# Altium PCB PCB1.PcbDoc
Units mil, origin at the board's own origin, x right, y up, seen from the top; angles counter-clockwise.
Board outline 5740 x 7090 mil, 2 copper layers (Top Layer, Bottom Layer); 175 components, 99 nets, 503 pads, 0 vias.
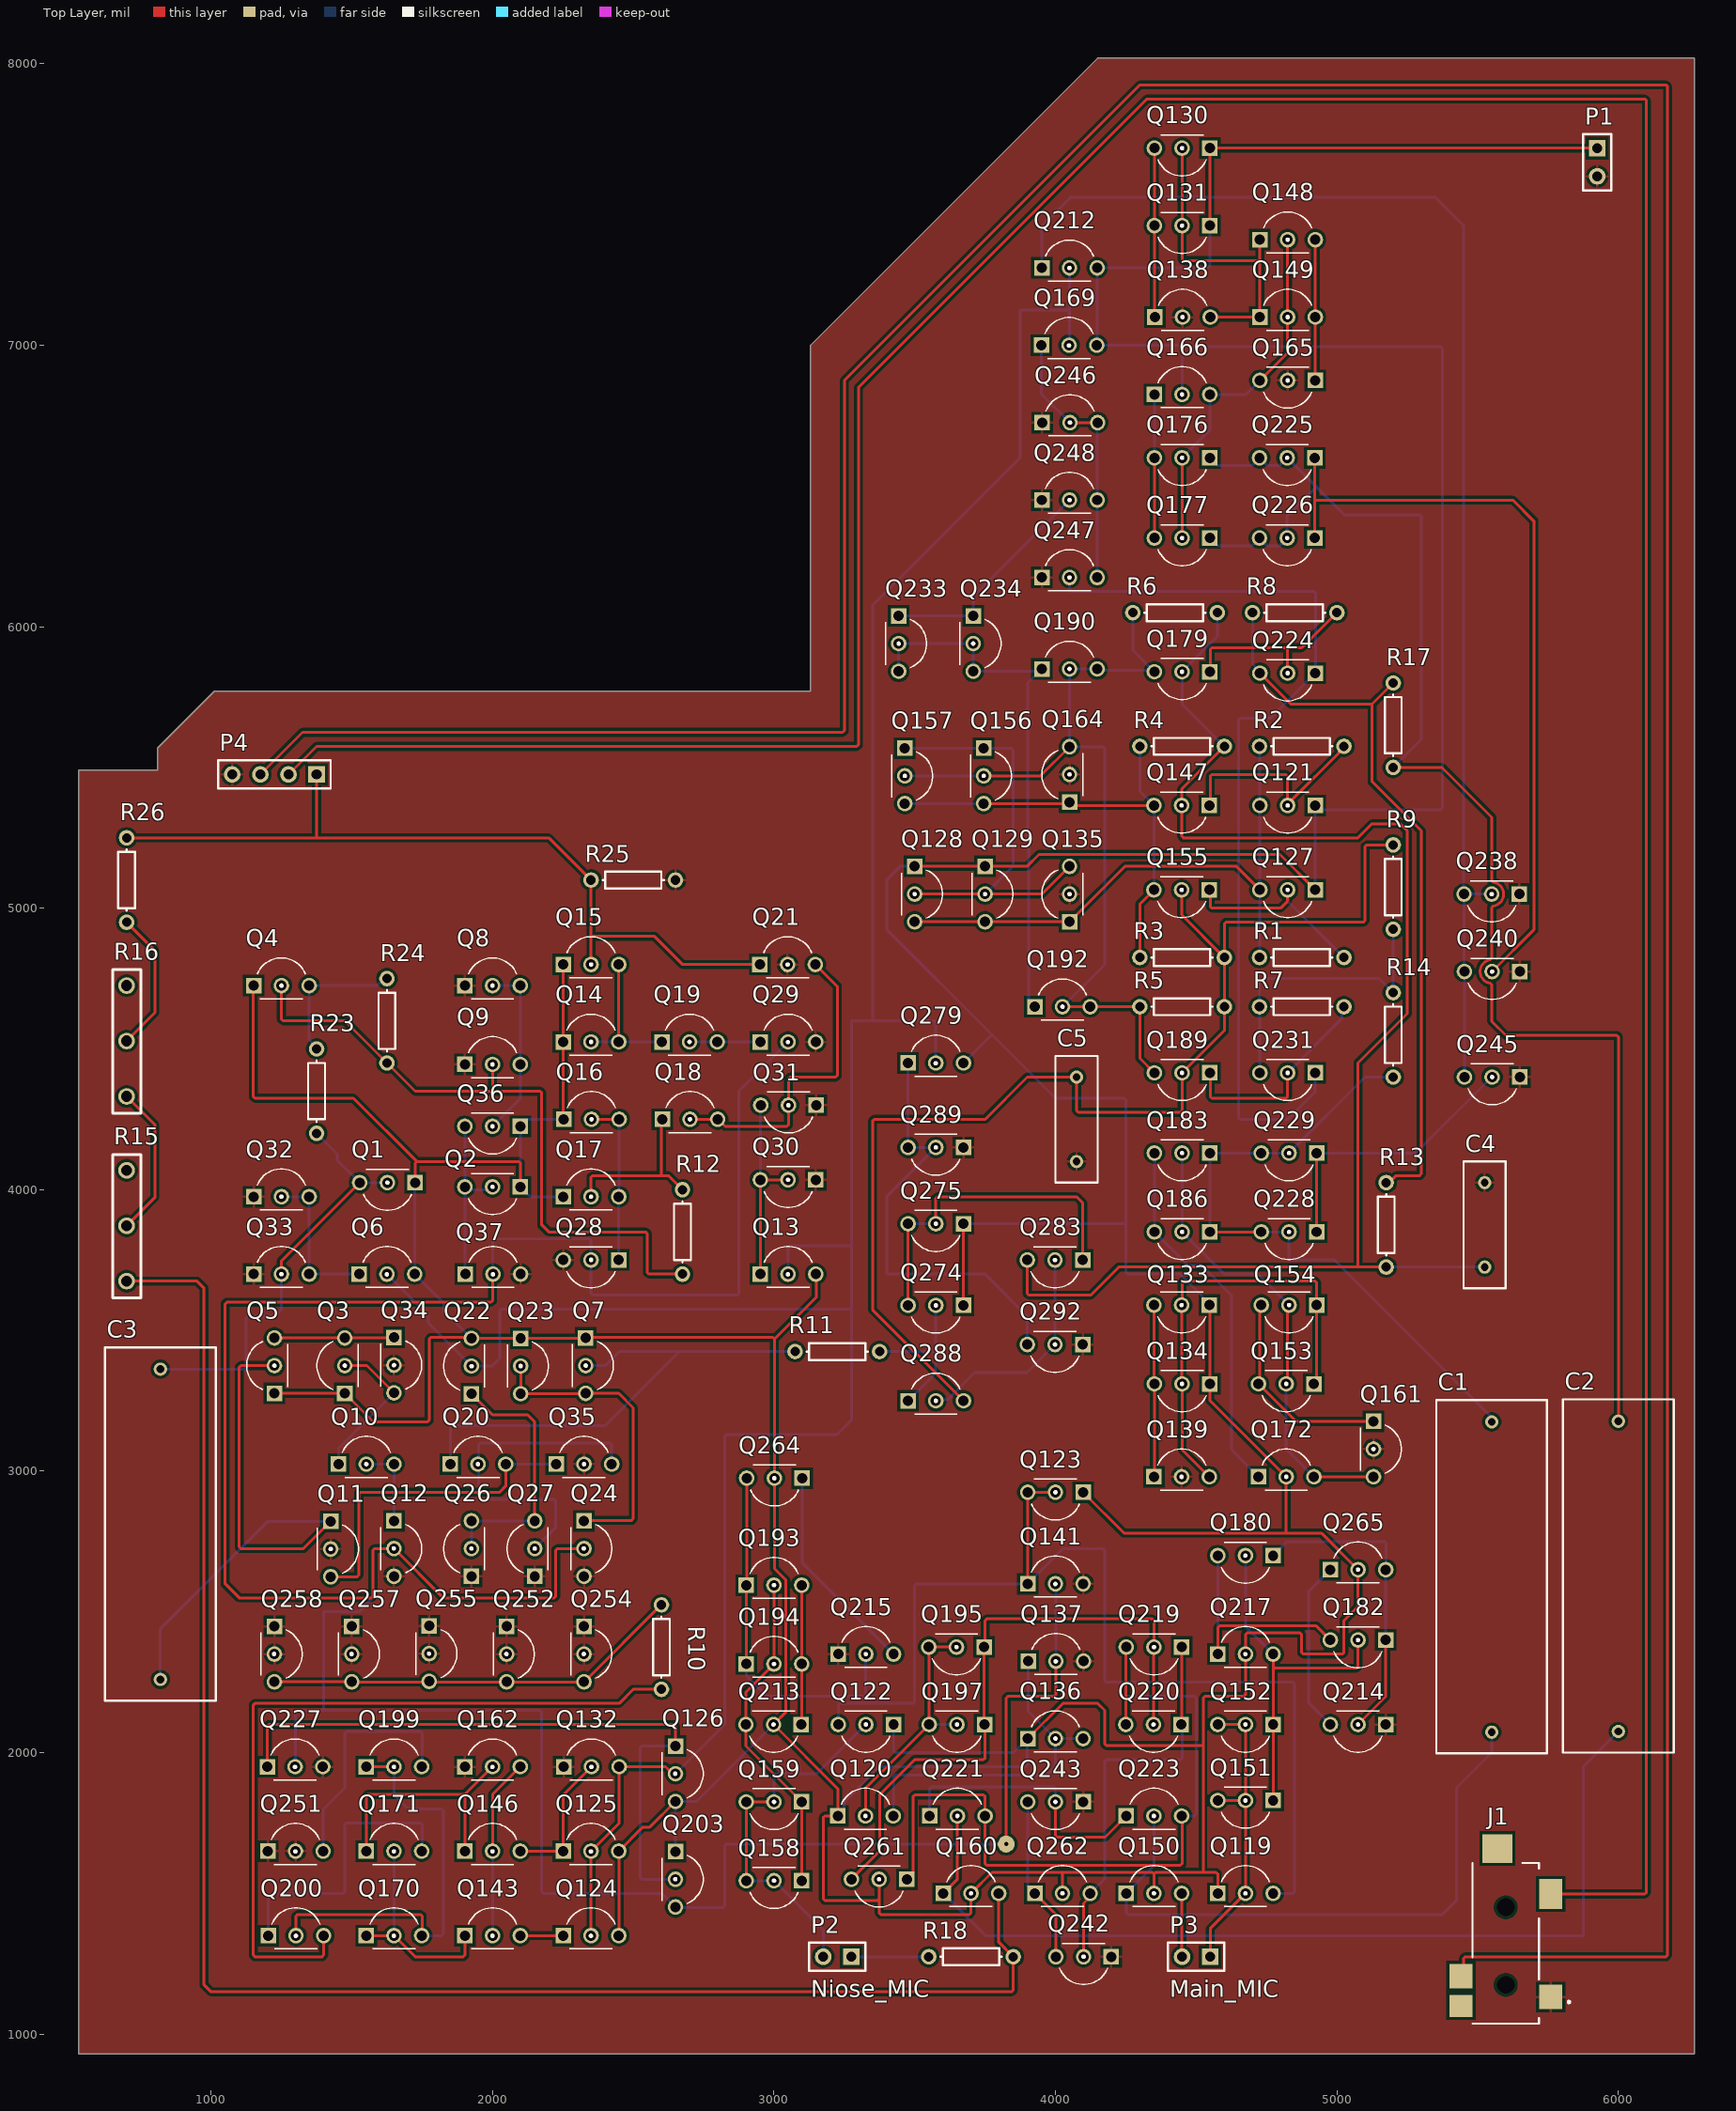
[diagram p0: Top Layer view]
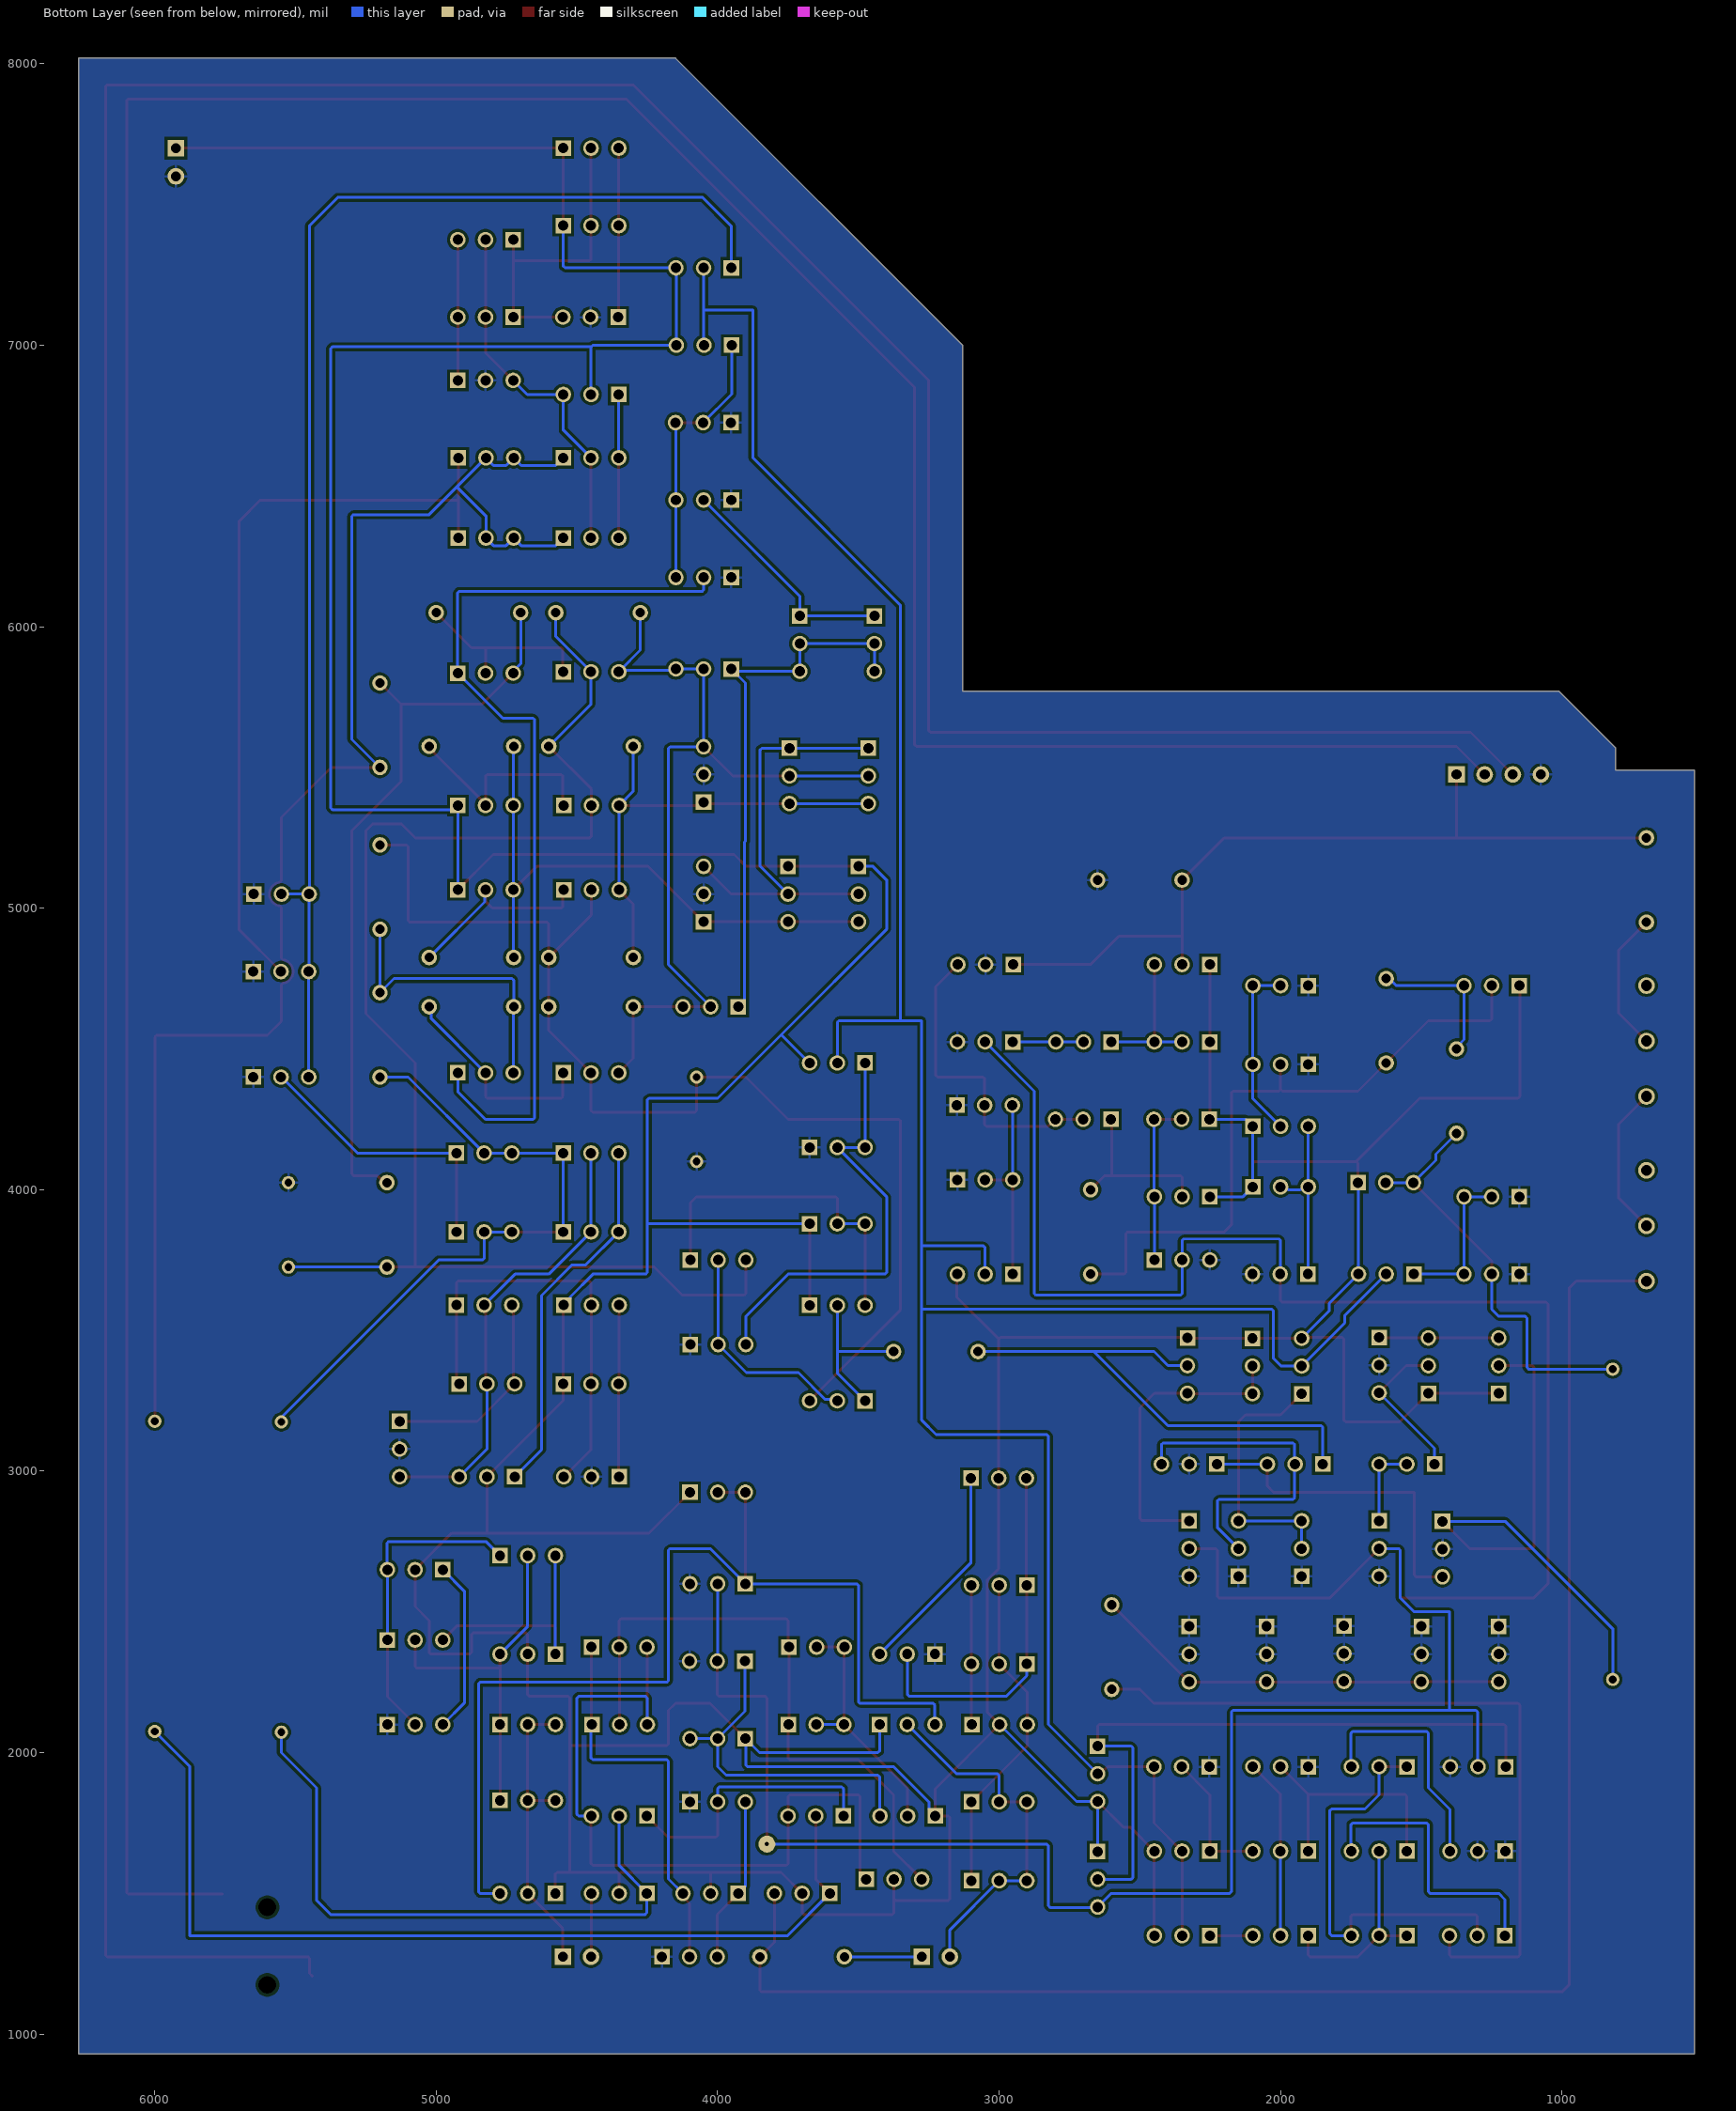
[diagram p1: Bottom Layer view, seen from below]
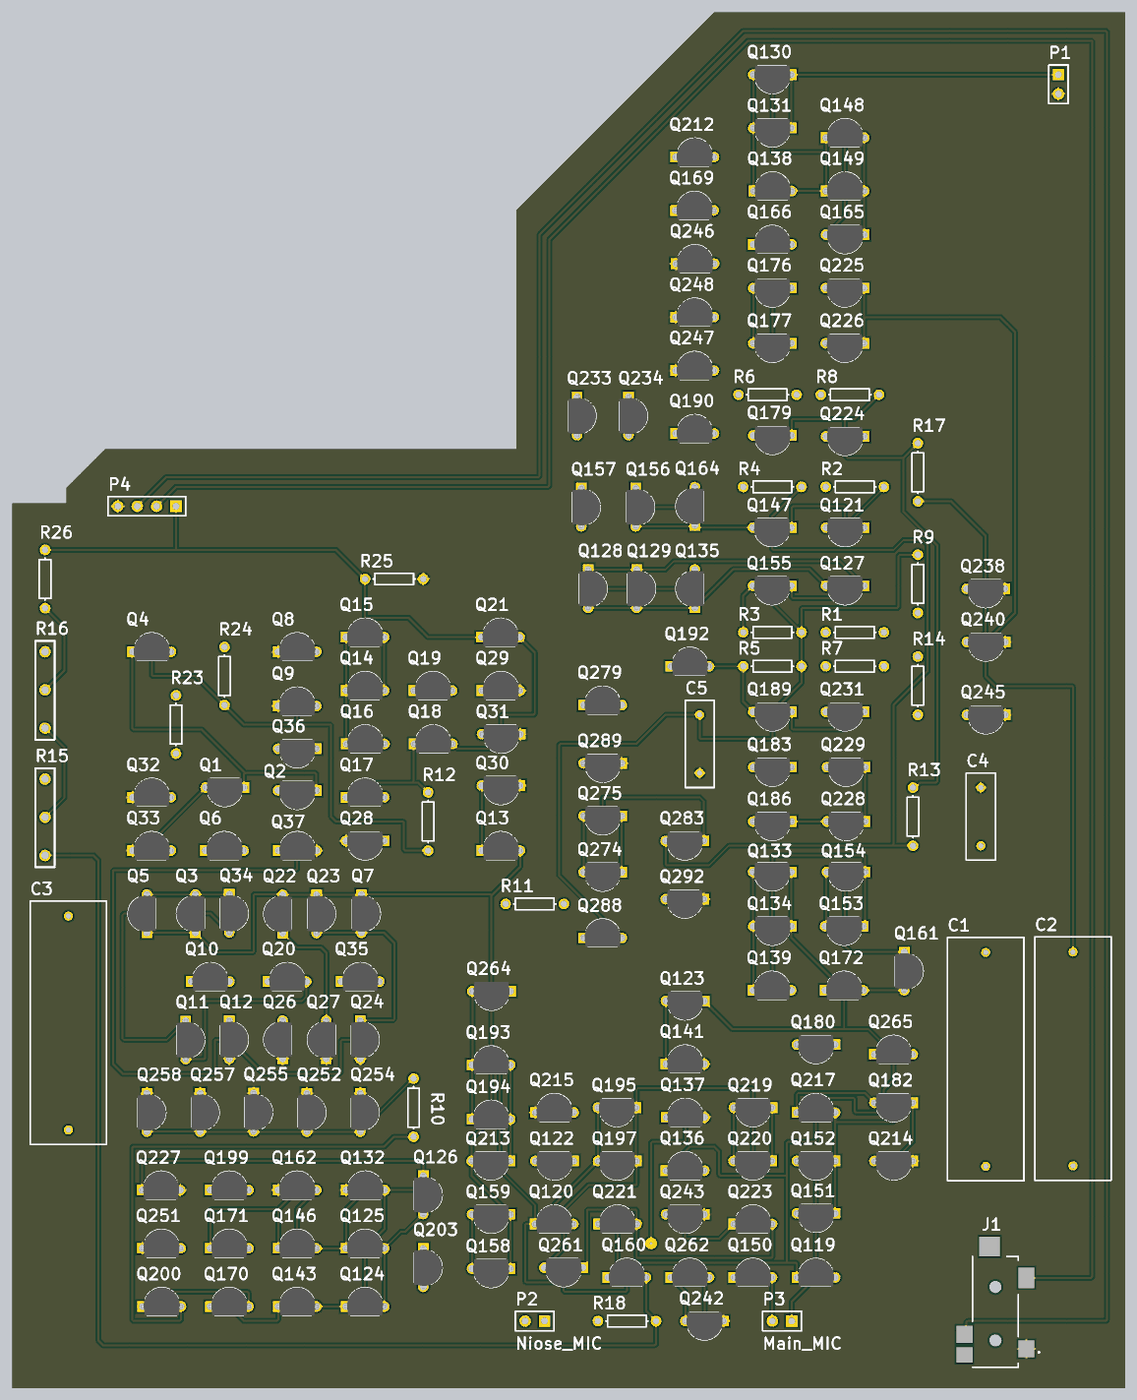
[diagram p2: 3D render of the assembled board from above, using the file's embedded part models]

## Layer stack, top to bottom
Top Solder: solder mask 0.4, Solder Resist, Dk 3.5
Top Layer: signal copper 1.4
Dielectric 1: dielectric 12.6, FR-4, Dk 4.8
Bottom Layer: signal copper 1.4
Bottom Solder: solder mask 0.4, Solder Resist, Dk 3.5

## Board outline
530,930 530,5490 810,5490 810,5570 1010,5770 3130,5770 3130,7000 4150,8020 6270,8020 6270,930

## Design rules (kind name [scope] priority, off if disabled: settings)
Clearance [All] p1: gap=10 ignorepadtopadclearanceinfootprint=FALSE except(0: Arc-Hole Track-Hole SMDPad-Hole THPad-Hole Via-Hole Fill-Hole Poly-Hole Region-Hole Text-Hole)
PolygonConnect [All] p1: connectstyle=Relief reliefconductorwidth=10 reliefentries=4 polygonreliefangle="90 Angle" airgapwidth=10
RoutingVias [All] p1: holewidth=28 width=50 viastyle="Through Hole" minholewidth=28 minwidth=50 maxholewidth=28 maxwidth=50
SolderMaskExpansion [All] p1: expansion=4 istentingtop=FALSE
Width [All] p1: maxlimit=10 minlimit=10 preferedwidth=10
30 further rules are at their usual default settings.

## Components (designator, comment, footprint, x,y, rotation, side; value= is the part's Value field where it differs from the comment)
C1 "Component_1" PCBComponent_1#1 5550,2072.64 r0 top
C2 "Component_1" PCBComponent_1#1 6000,2075 r0 top
C3 "Component_1" PCBComponent_1#1 820,2260 r0 top
C4 "Cap" RAD-0.3 5525,3875 r90 top value=1pF
C5 "Cap" RAD-0.3 4075,4250 r270 top value=1pF
J1 "35RASMT4BHNTRX" 35RASMT4BHNTRX 5600,1324.61 r90 top
P1 "BAT" HDR1X2 5925,7700 r270 top
P2 "Niose_MIC" HDR1X2 3275,1275 r180 top
P3 "Main_MIC" HDR1X2 4550,1275 r180 top
P4 "Header 4" HDR1X4 1375,5475 r180 top
Q1 "KSA992FTA" PCBComponent_1#2 1626.57,4025 r180 top
Q2 "KSA992FTA" PCBComponent_1#2 2000,4010 r180 top
Q3 "KSA992FTA" PCBComponent_1#2 1475,3375 r90 top
Q4 "KSA992FTA" PCBComponent_1#2 1250,4725 r0 top
Q5 "KSA992FTA" PCBComponent_1#2 1225,3375 r90 top
Q6 "BC560B" TO92250P510H770-3 1625,3700 r0 top
Q7 "KSA992FTA" PCBComponent_1#2 2331,3375 r270 top
Q8 "KSC1845FTA" PCBComponent_1#2 2000,4725 r0 top
Q9 "KSC1845FTA" PCBComponent_1#2 2000,4445 r0 top
Q10 "KSA992FTA" PCBComponent_1#2 1551.57,3025 r0 top
Q11 "KSA992FTA" PCBComponent_1#2 1425,2723.43 r270 top
Q12 "BC550B" TO92250P510H770-3 1650,2725 r270 top
Q13 "BC560B" TO92250P510H770-3 3050,3700 r0 top
Q14 "KSA992FTA" PCBComponent_1#2 2350,4525 r0 top
Q15 "KSA992FTA" PCBComponent_1#2 2350,4800 r0 top
Q16 "KSA992FTA" PCBComponent_1#2 2351.57,4250 r0 top
Q17 "KSA992FTA" PCBComponent_1#2 2350,3975 r0 top
Q18 "KSA992FTA" PCBComponent_1#2 2701.57,4250 r0 top
Q19 "KSA992FTA" PCBComponent_1#2 2700,4525 r0 top
Q20 "KSA992FTA" PCBComponent_1#2 1948.43,3025 r0 top
Q21 "KSA992FTA" PCBComponent_1#2 3048.43,4800 r0 top
Q22 "BC560B" TO92250P510H770-3 1925,3373.43 r90 top
Q23 "KSA992FTA" PCBComponent_1#2 2100,3373.43 r270 top
Q24 "BC550B" TO92250P510H770-3 2325,2725 r270 top
Q26 "KSC1845FTA" PCBComponent_1#2 1925,2725 r90 top
Q27 "KSC1845FTA" PCBComponent_1#2 2150,2725 r90 top
Q28 "BC550B" TO92250P510H770-3 2350,3750 r180 top
Q29 "BC550B" TO92250P510H770-3 3050,4525 r0 top
Q30 "KSC1845FTA" PCBComponent_1#2 3050,4035 r180 top
Q31 "KSC1845FTA" PCBComponent_1#2 3051.57,4300 r180 top
Q32 "KSC1845FTA" PCBComponent_1#2 1250,3975 r0 top
Q33 "KSC1845FTA" PCBComponent_1#2 1250,3700 r0 top
Q34 "KSA992FTA" PCBComponent_1#2 1650,3376.57 r270 top
Q35 "KSA992FTA" PCBComponent_1#2 2325,3025 r0 top
Q36 "KSA992FTA" PCBComponent_1#2 2000,4225 r180 top
Q37 "BC550B" TO92250P510H770-3 2001.57,3700 r0 top
Q119 "KSA992FTA" PCBComponent_1#2 4675,1500 r0 top
Q120 "KSA992FTA" PCBComponent_1#2 3325,1775 r0 top
Q121 "KSA992FTA" PCBComponent_1#2 4825,5365 r180 top
Q122 "KSA992FTA" PCBComponent_1#2 3326.57,2100 r180 top
Q123 "KSA992FTA" PCBComponent_1#2 4000,2925 r180 top
Q124 "BC560B" TO92250P510H770-3 2350,1350 r0 top
Q125 "BC560B" TO92250P510H770-3 2350,1650 r0 top
Q126 "BC560B" TO92250P510H770-3 2650,1925 r270 top
Q127 "KSA992FTA" PCBComponent_1#2 4825,5065 r180 top
Q128 "KSA992FTA" PCBComponent_1#2 3500,5050 r270 top
Q129 "KSA992FTA" PCBComponent_1#2 3750,5050 r270 top
Q130 "KSA992FTA" PCBComponent_1#2 4450,7700 r180 top
Q131 "KSA992FTA" PCBComponent_1#2 4450,7425 r180 top
Q132 "BC560B" TO92250P510H770-3 2351.57,1950 r0 top
Q133 "KSA992FTA" PCBComponent_1#2 4448.43,3590 r180 top
Q134 "KSA992FTA" PCBComponent_1#2 4450,3310 r180 top
Q135 "KSA992FTA" PCBComponent_1#2 4050,5050 r90 top
Q136 "KSA992FTA" PCBComponent_1#2 4000,2050 r0 top
Q137 "BC550B" TO92250P510H770-3 4001.57,2325 r0 top
Q138 "KSA992FTA" PCBComponent_1#2 4451.57,7100 r0 top
Q139 "KSA992FTA" PCBComponent_1#2 4448.43,2980 r0 top
Q141 "BC550B" TO92250P510H770-3 4000,2600 r0 top
Q143 "BC560B" TO92250P510H770-3 2000,1350 r0 top
Q146 "BC560B" TO92250P510H770-3 2000,1650 r0 top
Q147 "KSA992FTA" PCBComponent_1#2 4448.43,5365 r180 top
Q148 "KSA992FTA" PCBComponent_1#2 4825,7375 r0 top
Q149 "KSA992FTA" PCBComponent_1#2 4825,7100 r0 top
Q150 "KSC1845FTA" PCBComponent_1#2 4350,1500 r0 top
Q151 "KSC1845FTA" PCBComponent_1#2 4675,1830 r180 top
Q152 "KSC1845FTA" PCBComponent_1#2 4675,2100 r180 top
Q153 "KSA992FTA" PCBComponent_1#2 4820,3310 r180 top
Q154 "KSA992FTA" PCBComponent_1#2 4830,3590 r180 top
Q155 "KSA992FTA" PCBComponent_1#2 4448.43,5065 r180 top
Q156 "KSA992FTA" PCBComponent_1#2 3745,5470 r270 top
Q157 "KSA992FTA" PCBComponent_1#2 3465,5470 r270 top
Q158 "KSC1845FTA" PCBComponent_1#2 3000,1545 r180 top
Q159 "KSC1845FTA" PCBComponent_1#2 3000,1825 r180 top
Q160 "KSC1845FTA" PCBComponent_1#2 3700,1500 r0 top
Q161 "KSA992FTA" PCBComponent_1#2 5130,3078.43 r270 top
Q162 "BC560B" TO92250P510H770-3 2000,1950 r0 top
Q164 "KSA992FTA" PCBComponent_1#2 4050,5475 r90 top
Q165 "KSA992FTA" PCBComponent_1#2 4825,6875 r180 top
Q166 "KSC1845FTA" PCBComponent_1#2 4450,6825 r0 top
Q169 "BC560B" TO92250P510H770-3 4048.43,7000 r0 top
Q170 "BC550B" TO92250P510H770-3 1650,1350 r0 top
Q171 "BC550B" TO92250P510H770-3 1650,1650 r0 top
Q172 "KSC1845FTA" PCBComponent_1#2 4820,2980 r0 top
Q176 "KSC1845FTA" PCBComponent_1#2 4450,6600 r180 top
Q177 "KSC1845FTA" PCBComponent_1#2 4450,6315 r180 top
Q179 "KSC1845FTA" PCBComponent_1#2 4450,5840 r180 top
Q180 "KSC1845FTA" PCBComponent_1#2 4675,2700 r180 top
Q182 "KSC1845FTA" PCBComponent_1#2 5075,2400 r180 top
Q183 "KSC1845FTA" PCBComponent_1#2 4450,4130 r180 top
Q186 "KSC1845FTA" PCBComponent_1#2 4450,3850 r180 top
Q189 "KSC1845FTA" PCBComponent_1#2 4450,4415 r180 top
Q190 "KSC1845FTA" PCBComponent_1#2 4050,5850 r0 top
Q192 "KSC1845FTA" PCBComponent_1#2 4025,4650 r0 top
Q193 "KSC1845FTA" PCBComponent_1#2 3000,2595 r0 top
Q194 "KSC1845FTA" PCBComponent_1#2 3000,2315 r0 top
Q195 "KSC1845FTA" PCBComponent_1#2 3648.43,2375 r180 top
Q197 "KSC1845FTA" PCBComponent_1#2 3650,2100 r180 top
Q199 "BC550B" TO92250P510H770-3 1650,1950 r0 top
Q200 "BC550B" TO92250P510H770-3 1301.57,1350 r0 top
Q203 "BC550B" TO92250P510H770-3 2650,1550 r270 top
Q212 "BC560B" TO92250P510H770-3 4050,7275 r0 top
Q213 "KSC1845FTA" PCBComponent_1#2 2998.43,2100 r180 top
Q214 "KSC1845FTA" PCBComponent_1#2 5075,2100 r180 top
Q215 "KSC1845FTA" PCBComponent_1#2 3326.57,2350 r0 top
Q217 "KSC1845FTA" PCBComponent_1#2 4675,2350 r0 top
Q219 "KSC1845FTA" PCBComponent_1#2 4350,2375 r180 top
Q220 "KSC1845FTA" PCBComponent_1#2 4348.43,2100 r180 top
Q221 "KSC1845FTA" PCBComponent_1#2 3651.57,1775 r0 top
Q223 "KSC1845FTA" PCBComponent_1#2 4350,1775 r0 top
Q224 "KSC1845FTA" PCBComponent_1#2 4825,5835 r180 top
Q225 "KSC1845FTA" PCBComponent_1#2 4823.43,6600 r180 top
Q226 "KSC1845FTA" PCBComponent_1#2 4823.43,6315 r180 top
Q227 "BC550B" TO92250P510H770-3 1298.43,1950 r0 top
Q228 "KSC1845FTA" PCBComponent_1#2 4830,3850 r180 top
Q229 "KSC1845FTA" PCBComponent_1#2 4830,4130 r180 top
Q231 "KSC1845FTA" PCBComponent_1#2 4825,4415 r180 top
Q233 "KSC1845FTA" PCBComponent_1#2 3443,5940 r270 top
Q234 "KSC1845FTA" PCBComponent_1#2 3708,5940 r270 top
Q238 "KSC1845FTA" PCBComponent_1#2 5550,5050 r180 top
Q240 "KSC1845FTA" PCBComponent_1#2 5551.57,4775 r180 top
Q242 "KSC1845FTA" PCBComponent_1#2 4100,1275 r180 top
Q243 "KSC1845FTA" PCBComponent_1#2 4000,1825 r180 top
Q245 "KSC1845FTA" PCBComponent_1#2 5551.57,4400 r180 top
Q246 "KSC1845FTA" PCBComponent_1#2 4051.57,6725 r0 top
Q247 "KSC1845FTA" PCBComponent_1#2 4050,6175 r0 top
Q248 "KSC1845FTA" PCBComponent_1#2 4050,6450 r0 top
Q251 "BC560B" TO92250P510H770-3 1300,1650 r0 top
Q252 "BC560B" TO92250P510H770-3 2050,2350 r270 top
Q254 "BC560B" TO92250P510H770-3 2325,2350 r270 top
Q255 "BC560B" TO92250P510H770-3 1775,2351.57 r270 top
Q257 "BC560B" TO92250P510H770-3 1500,2350 r270 top
Q258 "BC560B" TO92250P510H770-3 1225,2350 r270 top
Q261 "KSC1845FTA" PCBComponent_1#2 3373.43,1550 r180 top
Q262 "KSC1845FTA" PCBComponent_1#2 4025,1500 r0 top
Q264 "KSC1845FTA" PCBComponent_1#2 3001.57,2975 r180 top
Q265 "KSC1845FTA" PCBComponent_1#2 5075,2650 r0 top
Q274 "KSA992FTA" PCBComponent_1#2 3575,3588.94 r180 top
Q275 "KSA992FTA" PCBComponent_1#2 3575,3878.94 r180 top
Q279 "BC560B" TO92250P510H770-3 3575,4450 r0 top
Q283 "KSA992FTA" PCBComponent_1#2 3998.43,3750 r180 top
Q288 "KSA992FTA" PCBComponent_1#2 3575,3250 r0 top
Q289 "KSC1845FTA" PCBComponent_1#2 3575,4150 r180 top
Q292 "KSC1845FTA" PCBComponent_1#2 3998.43,3450 r180 top
R1 "Res1" AXIAL-0.3 4875,4825 r180 top value=600k
R2 "Res1" AXIAL-0.3 4875,5575 r180 top value=600k
R3 "Res1" AXIAL-0.3 4450,4825 r180 top value=600k
R4 "Res1" AXIAL-0.3 4450,5575 r180 top value=600k
R5 "Res1" AXIAL-0.3 4450,4650 r0 top value=600k
R6 "Res1" AXIAL-0.3 4425,6050 r0 top value=600k
R7 "Res1" AXIAL-0.3 4875,4650 r0 top value=600k
R8 "Res1" AXIAL-0.3 4850,6050 r0 top value=600k
R9 "Res1" AXIAL-0.3 5200,5075 r90 top value=100k
R10 "Res1" AXIAL-0.3 2600,2375 r270 top value=20
R11 "Res1" AXIAL-0.3 3225,3425 r180 top value=5k
R12 "Res1" AXIAL-0.3 2675,3850 r90 top value=5k
R13 "Res1" AXIAL-0.3 5175,3875 r270 top value=100k
R14 "Res1" AXIAL-0.3 5200,4550 r270 top value=1K
R15 "Res1" PCBComponent_1#3 700,3871.85 r90 top value=9Meg
R16 "Res1" PCBComponent_1#3 700,4528.15 r90 top value=1Meg
R17 "Res1" AXIAL-0.3 5200,5650 r90 top value=1K
R18 "Res1" AXIAL-0.3 3700,1275 r0 top value=10K
R23 "Res1" AXIAL-0.3 1375,4350 r90 top value=100
R24 "Res1" AXIAL-0.3 1625,4600 r90 top value=33k
R25 "Res1" AXIAL-0.3 2500,5100 r0 top value=11k
R26 "Res1" AXIAL-0.3 700,5100 r90 top value=1Meg

## Footprints (in the part's own frame and the unit in brackets; to place one, negate y for a bottom-side part, rotate by r counter-clockwise, add the part's x,y. Pads: shape width x height; smd on the part's side, far side on the other; paste and mask are expansions set on the pad)
35RASMT4BHNTRX [mm]
  rect 2.2x2.1 smd: 1(-4.9,-4.05) 2(-3,4.05)
  rect 2.7x2.1 smd: 3(4.4,-4.05)
  rect 2x2.1 smd: 4(-5.7,4.05)
  rect 2.6x2.7 smd: 5(8.5,0.75)
  round 0.8 hole 1.6 unplated: MH1(-3.8,0) MH2(3.2,0)
  silkscreen extent -7.3,-5.8 7.2,3
AXIAL-0.3 [mm] "Axial Device, Thru-Hole; 2 Leads; 0.3 in Pin Spacing"
  round 1.4 hole 0.85: 1(-3.81,0) 2(3.81,0)
  silkscreen extent -2.77,-0.76 2.77,0.76
HDR1X2 [mm] "Connector; Header; 2 Position"
  rect 1.5x1.5 hole 0.9: 1(0,0)
  round 1.5 hole 0.9: 2(2.54,0)
  silkscreen extent -1.27,-1.27 3.81,1.27
HDR1X4 [mm] "Connector; Header; 4 Position"
  rect 1.5x1.5 hole 0.9: 1(0,0)
  round 1.5 hole 0.9: 2(2.54,0) 3(5.08,0) 4(7.62,0)
  silkscreen extent -1.27,-1.27 8.89,1.27
PCBComponent_1#1 [mm]
  round 1.2 hole 0.7: 1(0,0) 2(0,28)
  silkscreen extent -5,-1.91 5,29.97
PCBComponent_1#2 [mm]
  rect 1.4x1.4 / inner round 1.4 / far side rect 1.4x1.4 hole 0.93: 1(-2.5,0)
  round 1.4 hole 0.93: 2(0,0) 3(2.5,0)
  silkscreen extent -2.18,-1.19 2.18,2.5, body extent -2.73,-1.19 2.73,2.5, height 8.7
PCBComponent_1#3 [mm]
  round 1.5 hole 1: 1(-5,0) 2(0,0) 3(5,0)
  silkscreen extent -6.52,-1.27 6.43,1.27
RAD-0.3 [mm] "Radial Cap, Thru-Hole; 2 Leads; 0.3 in Pin Spacing"
  round 1.2 hole 0.7: 1(-3.81,0) 2(3.81,0)
  silkscreen extent -5.71,-1.91 5.71,1.91
TO92250P510H770-3 [mm]
  rect 1.4x1.4 / inner round 1.4 / far side rect 1.4x1.4 hole 0.93: 1(-2.5,0)
  round 1.4 hole 0.93: 2(0,0) 3(2.5,0)
  silkscreen extent -2.18,-1.19 2.18,2.5, body extent -2.73,-1.19 2.73,2.5, height 8.7

## Part data
C4 C5: "Capacitor", LatestRevisionDate=17-Jul-2002, LatestRevisionNote="Re-released for DXP Platform.", PackageDescription="Radial Cap, Thru-Hole; 2 Leads; 0.3 in Pin Spacing", PackageReference=RAD-0.3, Published=8-Jun-2000, Publisher="Altium Limited"
J1: "Phone Connectors SMT 3.5MM PHONE JACK", Manufacturer_Name=Switchcraft, Mouser Part Number=502-35RASMT4BHNTRX, Arrow Part Number=35RASMT4BHNTRX, Arrow Price/Stock=https://www.arrow.com/en/products/35rasmt4bhntrx/switchcraft?region=nac, Datasheet Link=https://www.arrow.com/en/products/35rasmt4bhntrx/switchcraft, Geometry.Height=5.127mm, Manufacturer_Part_Number=35RASMT4BHNTRX, Mouser Price/Stock=https://www.mouser.co.uk/ProductDetail/Switchcraft/35RASMT4BHNTRX?qs=iwvYsH9bSFa%252BoLnvLbECxQ%3D%3D
P1 P2 P3: library part "Header 2", "Header, 2-Pin", LatestRevisionDate=17-Jul-2002, LatestRevisionNote="Re-released for DXP Platform.", Publisher="Altium Limited"
P4: "Header, 4-Pin", LatestRevisionDate=17-Jul-2002, LatestRevisionNote="Re-released for DXP Platform.", Publisher="Altium Limited"
Q1 Q2 Q3 Q4 Q5 Q7 Q10 Q11 Q14 Q15 Q16 Q17 Q18 Q19 Q20 Q21 Q23 Q34 Q35 Q36 Q119 Q120 Q121 Q122 Q123 Q127 Q128 Q129 Q130 Q131 Q133 Q134 Q135 Q136 Q138 Q139 Q147 Q148 Q149 Q153 Q154 Q155 Q156 Q157 Q161 Q164 Q165 Q274 Q275 Q283 Q288: "TO-92, 120V, 0.05A,VA=100V,small signal PNP Bipolar Transistor", Package="TO-92 Taiwan Semiconductor", Availability="In Stock", Check_prices=https://www.snapeda.com/parts/BC337-40%20A1G/Taiwan+Semiconductor/view-part/?ref=eda, MF="Taiwan Semiconductor", MP="BC337-40 A1G", Price=None, Purchase-URL="https://pricing.snapeda.com/search/part/BC337-40 A1G/?ref=eda", SnapEDA_Link=https://www.snapeda.com/parts/BC337-40%20A1G/Taiwan+Semiconductor/view-part/?ref=snap
Q6 Q13 Q22 Q124 Q125 Q126 Q132 Q143 Q146 Q162 Q169 Q212 Q251 Q252 Q254 Q255 Q257 Q258 Q279: "TO-92, 45V, 0.1A, PNP Bipolar Transistor", Package="TO-92 Taiwan Semiconductor", Availability="In Stock", Check_prices=https://www.snapeda.com/parts/BC337-40%20A1G/Taiwan+Semiconductor/view-part/?ref=eda, MF="Taiwan Semiconductor", MP="BC337-40 A1G", Price=None, Purchase-URL="https://pricing.snapeda.com/search/part/BC337-40 A1G/?ref=eda", SnapEDA_Link=https://www.snapeda.com/parts/BC337-40%20A1G/Taiwan+Semiconductor/view-part/?ref=snap
Q8 Q9 Q26 Q27 Q30 Q31 Q32 Q33 Q150 Q151 Q152 Q158 Q159 Q160 Q166 Q172 Q176 Q177 Q179 Q180 Q182 Q183 Q186 Q189 Q190 Q192 Q193 Q194 Q195 Q197 Q213 Q214 Q215 Q217 Q219 Q220 Q221 Q223 Q224 Q225 Q226 Q228 Q229 Q231 Q233 Q234 Q238 Q240 Q242 Q243 Q245 Q246 Q247 Q248 Q261 Q262 Q264 Q265 Q289 Q292: "TO-92, 120V, 0.05A,150VA,small signall NPN Bipolar Transistor", Package="TO-92 Taiwan Semiconductor", Availability="In Stock", Check_prices=https://www.snapeda.com/parts/BC337-40%20A1G/Taiwan+Semiconductor/view-part/?ref=eda, MF="Taiwan Semiconductor", MP="BC337-40 A1G", Price=None, Purchase-URL="https://pricing.snapeda.com/search/part/BC337-40 A1G/?ref=eda", SnapEDA_Link=https://www.snapeda.com/parts/BC337-40%20A1G/Taiwan+Semiconductor/view-part/?ref=snap
Q12 Q24 Q28 Q29 Q37 Q137 Q141 Q170 Q171 Q199 Q200 Q203 Q227: "TO-92, 45V, 0.1A, NPN Bipolar Transistor", Package="TO-92 Taiwan Semiconductor", Availability="In Stock", Check_prices=https://www.snapeda.com/parts/BC337-40%20A1G/Taiwan+Semiconductor/view-part/?ref=eda, MF="Taiwan Semiconductor", MP="BC337-40 A1G", Price=None, Purchase-URL="https://pricing.snapeda.com/search/part/BC337-40 A1G/?ref=eda", SnapEDA_Link=https://www.snapeda.com/parts/BC337-40%20A1G/Taiwan+Semiconductor/view-part/?ref=snap
R1 R2 R3 R4 R5 R6 R7 R8 R9 R10 R11 R12 R13 R14 R15 R16 R17 R18 R23 R24 R25 R26: "Resistor", LatestRevisionDate=17-Jul-2002, LatestRevisionNote="Re-released for DXP Platform.", PackageDescription="Axial Device, Thru-Hole; 2 Leads; 0.3 in Pin Spacing", PackageReference=AXIAL-0.3, Published=8-Jun-2000, Publisher="Altium Limited"

## Free pads (board coordinates)
  round 60 hole 15: 3(3825,1675)

## Nets (pads, with @x,y where several pads share a name; then routed paths per layer and width w, separated by ;. In a path a pad name is that pad's centre, name@x,y a point inside that pad or via, vN(x,y) a via of type N, cw(c..) or ccw(c..) an arc to the next point about the centre after c; other vN are vias at no path point)
Basen2: pad.3 Q12.2 Q24.2 Q28.2 Q29.2 Q37.2 Q137.2 Q141.2 Q203.3 Q227.2 | length 11404.2
  Top Layer w10: Q37.2 2000,3698.43 2000,3605.86 1994.14,3600 1055.86,3600 1050,3594.14 1050,2600 1100,2550 1569.14,2550 1575,2555.86 1575,2719.14 1580.86,2725 Q12.2 1825,2550 2219.14,2550 2225,2555.86 2225,2719.14 2230.86,2725 Q24.2 ; Q203.3 Q203.3@2651.57,1450 ; pad.3@3819.14,1675 3825,1680.86 3825,2194.14 3830.86,2200 3995.72,2200 4001.57,2205.86 Q137.2
  Bottom Layer w10: Q227.2 1300,1951.57 1300,2144.14 1305.86,2150 1400,2150 ; Q12.2 1580.86,2725 1575,2719.14 1575,2550 1525,2500 1400,2500 1400,2150 ; Q37.2 2000,3701.57 2000,3819.14 2005.86,3825 2344.14,3825 2350,3819.14 Q28.2 2350,3630.86 2355.86,3625 2869.14,3625 2875,3630.86 2875,4350 Q29.2 ; pad.3 2830.86,1675 2825,1669.14 2825,1455.86 2819.14,1450 2651.57,1450 Q203.3 2601.57,1500 2180.86,1500 2175,1505.86 2175,2144.14 2169.14,2150 1400,2150 ; Q141.2 4000.79,2599.21 4000.79,2325.79 Q137.2
Basep1: Q6.2 Q13.2 Q22.2 Q124.2 Q125.2 Q126.2 Q132.3 Q169.2 Q212.2 Q279.2 | length 9966
  Top Layer w10: Q124.2 Q125.2 2450,1750 Q132.3 2614.81,1950 2639.81,1925 Q126.2
  Bottom Layer w10: Q6.2 1771.95,3553.05 1771.95,3526.48 Q22.2 1998.43,3373.43 2025,3400 2025,3569.14 2030.86,3575 3275,3575 ; Q124.2 Q124.2@2354.32,1354.32 ; Q126.2 2825,2100 2825,3124.14 2830.86,3130 3224.14,3130 3275,3180.86 3275,3575 ; Q13.2 3050,3794.14 3055.86,3800 3275,3800 ; Q279.2 3575,4594.14 3569.14,4600 3350,4600 ; Q169.2 4049.21,7000.79 4049.21,7125 ; Q212.2 4049.21,7274.21 4049.21,7125 ; 3275,3575 3275,3800 ; 3275,3800 3275,4600 3350,4600 ; 3350,4600 3350,6075 3875,6600 3875,7125 4049.21,7125
basep2: Q143.2 Q146.2 Q162.3 | length 640.8
  Top Layer w10: Q146.2 2000,1851.57 Q162.3
  Bottom Layer w10: Q143.2 Q146.2
GND: C4.2 C5.2 J1.1 P1.2 P4.4 Q8.1 Q9.1 Q11.2 Q12.3 Q21.2 Q24.3 Q26.1 Q27.1 Q28.3 Q29.3 Q30.1 Q31.1 Q32.1 Q33.1 Q34.2 Q35.2 Q37.3 Q132.1 Q135.2 Q137.3 Q138.2 Q139.2 Q141.3 Q161.2 Q162.1 Q164.2 Q165.2 Q214.1 Q215.1 Q227.3 Q238.1 Q240.1 Q242.1 Q243.1 Q245.1 Q246.1 Q247.1 Q248.1 Q251.1 Q251.2 Q252.1 Q252.2 Q254.1 Q254.2 Q255.1 Q255.2 Q257.1 Q257.2 Q258.1 Q258.2 Q289.1 Q292.1 R25.2
NetC1_1: C1.1 Q150.1 Q223.2 | length 2230.9
  Bottom Layer w10: Q223.2 4350,1598.43 Q150.1 4251.57,1430.86 4257.43,1425 5375,1425 5425,1475 5425,1875 5550,2000 C1.1
NetC1_2: C1.2 Q183.1 Q186.1 Q228.2 Q228.3 Q229.2 Q229.3 R14.2 | length 2389.2
  Top Layer w10: Q186.1 Q228.3
  Bottom Layer w10: Q186.1 Q183.1 Q229.3 Q229.2 5100,4400 R14.2 ; Q228.3 Q228.2 4830,3755.86 4835.86,3750 4991.21,3750 5550,3191.21 C1.2
NetC2_1: C2.1 Q160.1 Q221.2 | length 3408
  Top Layer w10: Q160.1 3651.57,1550 Q221.2
  Bottom Layer w10: Q160.1 3751.57,1350 5875,1350 5875,1950 C2.1
NetC2_2: C2.2 Q176.1 Q177.1 Q225.2 Q225.3 Q226.2 Q226.3 R17.1 | length 5429.9
  Top Layer w10: R17.1 5373.04,5500 5550,5323.04 5550,5097.46 5552.93,5094.53 5555.22,5092.24 cw(c5550,5050) 5555.22,5007.76 5552.93,5005.47 5550,5002.54 5550,4822.13 5547.07,4819.2 5544.91,4817.03 ccw(c5551.57,4775) 5544.91,4732.97 5550,4727.87 5550,4598.04 5600,4548.04 5994.14,4548.04 6000,4542.18 C2.2
  Bottom Layer w10: Q177.1 4575.39,6288.04 4698.04,6288.04 Q226.3 4751.96,6288.04 4796.46,6288.04 Q226.2 4823.43,6393.43 4926.71,6496.71 ; Q176.1 4575.39,6573.04 4698.04,6573.04 Q225.3 4751.96,6573.04 4796.46,6573.04 Q225.2 4926.71,6496.71 ; R17.1 5300,5600 5300,6392.18 5294.14,6398.04 5025.39,6398.04 4926.71,6496.71
NetC3_1: C3.1 Q5.2 Q11.1 | length 2076.4
  Top Layer w10: Q5.2 1105.86,3375 1100,3369.14 1100,2730.86 1105.86,2725 1328.15,2725 Q11.1
  Bottom Layer w10: C3.1 820,2440 1201.85,2821.85 Q11.1
NetC3_2: C3.2 Q1.2 Q1.3 Q33.2 R23.1 | length 1523.2
  Top Layer w10: Q33.2 1250,3746.85 Q1.3
  Bottom Layer w10: C3.2 1119.14,3362.36 1125,3368.22 1125,3544.14 1130.86,3550 1225,3550 1250,3575 Q33.2 ; R23.1 1448.52,4126.48 1448.52,4104.63 Q1.3 Q1.2
NetC4_1: C4.1 Q147.2 Q179.2 Q283.3 R4.1 R6.2 R13.2 | length 5216.4
  Top Layer w10: Q283.3 3900,3630.86 3905.86,3625 4125,3625 4225,3725 5075,3725 ; R4.1 4448.43,5423.43 Q147.2 4448.43,5255.86 4454.28,5250 5075,5250 5125,5300 5225,5300 5250,5275 5250,4625 5075,4450 5075,3725 ; R13.2 5075,3725
  Bottom Layer w10: R6.2 4575,5965 Q179.2 4450,5725 R4.1 ; R13.2 C4.1
NetC5_1: C5.1 Q155.2 Q189.2 Q288.3 R3.1 R5.2 R9.2 | length 4315.4
  Top Layer w10: Q288.3 3350,3573.43 3350,4244.14 3355.86,4250 3750,4250 3900,4400 C5.1 4075,4280.86 4080.86,4275 4444.14,4275 4450,4280.86 Q189.2 4600,4565 R5.2 R3.1 ; Q155.2 4448.43,4976.57 R3.1 ; R9.2 5105.86,5225 5100,5219.14 5100,4955.86 5094.14,4950 4605.86,4950 4600,4944.14 R3.1
NetJ1_2: J1.2 P4.3 | length 14180.7
  Top Layer w10: P4.3 1325,5625 3244.14,5625 3250,5630.86 3250,6875 4300,7925 6169.14,7925 6175,7919.14 6175,1280.86 6169.14,1275 5455.86,1275 5450,1269.14 5450,1215.94 J1.2
NetJ1_3: J1.3 P4.2 | length 13273.4
  Top Layer w10: P4.2 1375,5575 3294.14,5575 3300,5580.86 3300,6850 4325,7875 6094.14,7875 6100,7869.14 6100,1503.69 6094.14,1497.83 J1.3
NetP1_1: P1.1 Q1.1 Q2.1 Q3.1 Q4.1 Q5.1 Q6.3 Q7.1 Q13.3 Q14.1 Q15.1 Q16.1 Q17.1 Q22.3 Q23.1 Q36.1 Q119.1 Q120.1 Q121.1 Q122.1 Q123.1 Q124.3 Q125.3 Q126.3 Q127.1 Q128.1 Q129.1 Q130.1 Q131.1 Q133.1 Q134.1 Q136.1 Q150.2 Q160.2 Q166.2 Q169.3 Q172.2 Q203.1 Q212.3 Q213.2 Q217.2 Q261.2 Q262.2 Q264.2 Q265.2 Q274.1 Q275.1 Q279.3 | length 28104.4
  Top Layer w10: Q4.1 1150,4723.43 1150,4330.86 1155.86,4325 1505.86,4325 1730.86,4100 ; Q5.1 Q3.1 1576.57,3175 1769.14,3175 1775,3180.86 1775,3469.14 1780.86,3475 1921.85,3475 Q22.3 Q23.1 2329.43,3471.85 Q7.1 ; Q1.1 1725,4094.14 1730.86,4100 ; Q2.1 2098.43,4094.14 2092.57,4100 1730.86,4100 ; Q15.1 Q14.1 2251.57,4251.57 Q16.1 ; Q7.1@2338.66,3475 2995.72,3475 3001.57,3469.14 ; Q124.3 2450,1351.57 2450,1648.43 Q125.3 2533.66,1735.24 2558.66,1735.24 Q126.3 ; Q13.3@3150,3702.29 3150,3617.57 3001.57,3469.14 ; Q261.2 3373.43,1480.86 ; Q128.1 Q129.1 3898.81,5148.43 3941.37,5190.98 4797.44,5190.98 Q127.1 ; Q274.1 Q275.1 ; Q136.1 4026.57,2175 4150,2175 4175,2150 4175,2030.86 4180.86,2025 4525,2025 ; Q262.2 4025,1569.14 4019.14,1575 ; Q123.1 4243.43,2780 4820,2780 ; Q150.2 4350,1569.14 ; Q133.1 4548.43,3588.43 Q134.1 4548.43,3251.57 Q172.2 4820,2780 ; Q131.1 Q130.1 P1.1 ; Q119.1 4576.57,1569.14 4570.72,1575 4525,1575 ; 3001.57,3469.14 3001.57,3045.06 Q264.2 3001.57,2653.61 3042.56,2612.63 3042.56,2144.13 Q213.2 3226.57,1871.85 Q120.1 3180.86,1775 3175,1769.14 3175,1480.86 3180.86,1475 3367.57,1475 3373.43,1480.86 ; 3373.43,1480.86 3373.43,1430.86 3379.28,1425 3694.14,1425 3700,1430.86 Q160.2 3775,1575 4019.14,1575 ; 4019.14,1575 4344.14,1575 4350,1569.14 ; 4350,1569.14 4355.86,1575 4525,1575 ; 4525,1575 4525,2025 ; 4525,2025 4525,2194.14 4530.86,2200 4669.14,2200 4675,2205.86 Q217.2 4675,2419.14 4680.86,2425 4869.14,2425 4875,2419.14 4875,2355.86 4880.86,2350 5019.14,2350 5025,2355.86 5025,2468.9 5075,2518.9 Q265.2 4945,2780 4820,2780
  Bottom Layer w10: Q1.1 1723.43,4023.43 Q6.3 1827.26,3596.16 1827.26,3569.59 Q22.3 ; Q17.1 2133.43,3975 Q2.1 Q36.1 2123.43,4250 Q16.1 ; Q203.1 Q126.3 2725,1826.57 Q213.2 ; Q120.1 3249.13,1797.56 3249.13,1824.13 3375,1950 3894.14,1950 3900,1955.86 Q136.1@3900,2048.43 ; Q122.1 3425,2005.86 3430.86,2000 3851.57,2000 Q136.1@3900,2048.43 ; Q128.1 3448.43,5148.43 3400,5100 3400,4925 3775,4550 ; Q275.1 4246.06,3878.94 4250,3875 ; Q279.3 3773.43,4550 3775,4550 ; Q136.1 Q136.1@3900,2048.43 ; Q166.2 4450,6994.14 ; Q133.1 4524.29,3612.56 4524.29,3618.86 4443.15,3700 4255.86,3700 4250,3705.86 4250,3875 ; Q131.1 4548.43,7280.86 4542.57,7275 Q212.3 4147.64,7274.21 4147.64,7000.79 Q169.3 4444.14,7000 4450,6994.14 ; Q127.1 Q121.1 4938.43,5350 5369.14,5350 5375,5355.86 5375,6988.28 5369.14,6994.14 4450,6994.14 ; 3775,4550 4000,4325 4244.14,4325 4250,4319.14 4250,3875
NetP2_1: P2.1 R18.1 | length 275
  Bottom Layer w10: P2.1 R18.1
NetP2_2: P2.2 Q122.2 Q158.2 Q158.3 Q159.2 Q159.3 | length 1315
  Top Layer w10: Q158.3 Q159.3 Q159.2
  Bottom Layer w10: Q158.3 Q158.2 3175,1370 P2.2 ; Q159.2 3000,1919.14 3005.86,1925 3151.57,1925 Q122.2
NetP3_1: P3.1 Q119.2 Q151.2 Q151.3 Q152.2 Q152.3 | length 1073.6
  Top Layer w10: P3.1 4550,1375 Q119.2 Q151.2 ; Q151.3 Q151.2 ; Q152.3 Q152.2 Q151.2
NetP3_2: P3.2 Q150.3 | length 225.7
  Top Layer w10: Q150.3 4449.21,1499.21 4449.21,1275.79 P3.2
NetP4_1: P4.1 Q15.2 Q21.1 R25.1 R26.2 | length 2878.6
  Top Layer w10: R26.2 1375,5250 ; P4.1 1375,5250 ; Q15.2 2350,4900 ; Q21.1 2675.4,4800 2575.4,4900 2350,4900 ; 1375,5250 2200,5250 R25.1 2350,4900
NetQ2_2: Q2.2 Q2.3 Q36.3 Q37.1 | length 635.5
  Bottom Layer w10: Q36.3 Q2.3 ; Q37.1 1901.57,3698.43 Q2.3 ; Q2.2 1991.37,4001.37 1972.95,4001.37 1971.58,4000 1929.99,4000 1928.62,4001.37 1910.21,4001.37 Q2.3
NetQ3_2: Q3.2 Q10.1 Q34.3 | length 549.8
  Top Layer w10: Q3.2 1553.15,3375 Q34.3
  Bottom Layer w10: Q10.1 1453.15,3081.3 Q34.3
NetQ3_3: Q3.3 Q5.3 Q34.1 | length 425.7
  Top Layer w10: Q5.3 Q3.3 1648.43,3473.43 Q34.1
NetQ4_2: Q4.2 Q9.2 R12.1 R24.1 | length 2369.2
  Top Layer w10: Q4.2 1250,4605.86 1255.86,4600 1475,4600 R24.1 1725,4350 1994.14,4350 2000,4355.86 ; Q9.2 2000,4355.86 ; R12.1 2555.86,3700 2550,3705.86 2550,3844.14 2544.14,3850 2200,3850 2175,3875 2175,4344.14 2169.14,4350 2005.86,4350 2000,4355.86
NetQ4_3: Q4.3 R23.2 R24.2 | length 522.9
  Bottom Layer w10: R23.2 1375,4507.04 1348.43,4533.61 Q4.3 1589.81,4725 1614.81,4750 R24.2
NetQ6_1: Q6.1 Q32.2 Q32.3 Q33.3 | length 551.6
  Bottom Layer w10: Q32.2 Q32.3 Q33.3 Q6.1
NetQ7_2: Q7.2 Q20.1 R11.2 | length 1820.5
  Bottom Layer w10: Q20.1 1850,3155.47 1855.86,3161.33 2400,3161.33 2663.67,3425 ; Q7.2 2400,3375 2450,3425 2663.67,3425 ; R11.2 2663.67,3425
NetQ7_3: Q7.3 Q23.2 Q23.3 Q24.1 | length 1092.7
  Top Layer w10: Q23.2 Q23.3 2100.79,3275.79 2330.21,3275.79 Q7.3 2448.43,3276.57 2500,3225 2500,2830.86 2494.14,2825 2326.57,2825 Q24.1
NetQ8_2: Q8.2 Q8.3 Q9.3 Q36.2 | length 639.2
  Bottom Layer w10: Q36.2 2098.43,4323.43 Q9.3 Q8.3 Q8.2
NetQ10_2: Q10.2 Q10.3 Q12.1 | length 300
  Bottom Layer w10: Q10.2 Q10.3 Q12.1
NetQ11_3: Q11.3 Q20.3 Q35.1 | length 1185.3
  Top Layer w10: Q11.3 1519.14,2625 1525,2630.86 1525,2925 2025,2925 2046.85,2946.85 Q20.3
  Bottom Layer w10: Q20.3 Q35.1
NetQ13_1: Q13.1 Q30.2 Q30.3 Q31.3 | length 699.1
  Top Layer w10: Q13.1 Q30.3 ; Q30.3@2952.36,4035.79 Q30.3 ; Q31.3@2952.36,4299.21 Q31.3 ; Q30.2 Q30.3
  Bottom Layer w10: Q30.3@2952.36,4035.79 Q31.3@2952.36,4299.21
NetQ14_2: Q14.2 Q14.3 Q15.3 Q19.1 | length 526.6
  Top Layer w10: Q14.3 Q15.3
  Bottom Layer w10: Q14.2 Q14.3 Q19.1
NetQ16_2: Q16.2 Q16.3 Q17.3 Q28.1 | length 599.1
  Top Layer w10: Q16.2 Q16.3
  Bottom Layer w10: Q28.1 Q17.3 2449.21,3975.79 2449.21,4249.21 Q16.3
NetQ17_2: Q17.2 Q18.1 R12.2 | length 608.7
  Top Layer w10: Q17.2 2350,4044.14 2355.86,4050 2600,4050 ; Q18.1@2600,4237.01 2600,4050 ; Q18.1@2600,4246.85 Q18.1 ; R12.2 2625,4050 2600,4050
NetQ18_2: Q18.2 Q18.3 Q21.3 Q31.2 | length 1130.9
  Top Layer w10: Q18.2 2801.9,4250 2826.9,4225 3045.72,4225 3051.57,4230.86 Q31.2 3051.57,4394.14 3057.43,4400 3219.14,4400 3225,4405.86 3225,4721.85 Q21.3
NetQ19_2: Q19.2 Q19.3 Q29.1 | length 251.6
  Bottom Layer w10: Q19.2 Q19.3 Q29.1
NetQ20_2: Q20.2 Q27.2 Q35.3 | length 1217.1
  Bottom Layer w10: Q27.2 2225,2800 2225,2894.14 2219.14,2900 1955.86,2900 1950,2905.86 1950,3023.43 Q20.2 1950,3026.57 1950,3094.14 1955.86,3100 2417.57,3100 2423.43,3094.14 Q35.3
NetQ22_1: Q22.1 Q26.2 Q26.3 Q27.3 | length 941.4
  Top Layer w10: Q22.1 2000,3200 2125,3200 2150,3175 Q27.3
  Bottom Layer w10: Q26.2 Q26.3 Q27.3
NetQ119_3: Q119.3 Q122.3 Q123.2 Q123.3 Q141.1 | length 3874.6
  Top Layer w10: Q141.1 Q123.3 Q123.2
  Bottom Layer w10: Q122.3 3228.15,2169.14 3234.01,2175 3494.14,2175 3500,2180.86 3500,2594.14 3505.86,2600 Q141.1 4026.57,2725 4169.14,2725 4175,2719.14 4175,2255.86 4180.86,2250 4844.14,2250 4850,2244.14 4850,1505.86 4844.14,1500 Q119.3
NetQ120_2: Q120.2 Q195.2 Q195.3 Q197.2 Q197.3 | length 891.4
  Top Layer w10: Q120.2 3325,1873.43 Q197.3 3550.79,2100.79 3550.79,2374.21 Q195.3 Q195.2
  Bottom Layer w10: Q197.3 Q197.2
NetQ120_3: Q120.3 Q136.2 Q136.3 Q137.1 | length 1243.2
  Bottom Layer w10: Q120.3 3425,1776.57 3425,1914.14 3430.86,1920 3970,1920 4000,1950 Q136.2 ; Q137.1 3903.15,2146.85 Q136.2 ; Q136.3 Q136.2
NetQ121_2: Q121.2 Q147.1 R2.1 | length 777.3
  Top Layer w10: Q147.1 4550,5368.15 4550,5469.14 4555.86,5475 4819.14,5475 4825,5469.14 Q121.2@4825,5370 ; Q121.2 Q121.2@4825,5370 ; R2.1 5025,5570 Q121.2@4825,5370
NetQ121_3: Q121.3 Q127.3 Q128.3 Q129.3 Q135.1 R1.2 R2.2 | length 2095.3
  Top Layer w10: Q128.3 Q129.3 Q135.1 4248.43,5150 4641.57,5150 Q127.3
  Bottom Layer w10: R1.2 4725.79,4825.79 4725.79,5064.21 Q127.3 Q121.3 4725.79,5365.79 4725.79,5574.21 R2.2
NetQ124_1: Q124.1 Q143.3 | length 153.1
  Top Layer w10: Q143.3 Q124.1
NetQ125_1: Q125.1 Q132.2 Q146.3 | length 494.6
  Top Layer w10: Q146.3 Q125.1 2251.57,1850 Q132.2
NetQ126_1: Q126.1 Q203.2 Q227.1 | length 2386.3
  Top Layer w10: Q227.1 1200,2094.14 1205.86,2100 2644.14,2100 2650,2094.14 Q126.1
  Bottom Layer w10: Q203.2 2530.86,1550 2525,1555.86 2525,2017.57 2530.86,2023.43 Q126.1
NetQ127_2: Q127.2 Q155.1 R1.1 | length 711.1
  Top Layer w10: Q155.1 4550,5061.85 4550,5005.86 4555.86,5000 4800,5000 4825,5025 Q127.2
  Bottom Layer w10: Q127.2 4827.56,5062.44 4827.56,5022.44 R1.1
NetQ128_2: Q128.2 Q129.2 Q135.3 Q156.1 Q157.1 | length 1531.2
  Top Layer w10: Q128.2 Q129.2 3951.57,5050 Q135.3
  Bottom Layer w10: Q157.1 Q156.1 3843.43,5568.43 3849.28,5562.57 3849.28,5149.28 Q129.2
NetQ130_2: Q130.2 Q131.2 Q138.3 Q148.1 Q149.1 | length 1124.7
  Top Layer w10: Q130.2 Q131.2 4450,7305.86 4455.86,7300 4726.57,7300 ; Q138.3 Q149.1 4726.57,7300 ; Q148.1 4726.57,7300
NetQ130_3: Q130.3 Q131.3 Q138.1 | length 600.7
  Top Layer w10: Q130.3 Q131.3 4351.57,7101.57 Q138.1
NetQ133_2: Q133.2 Q134.2 Q139.3 Q153.1 Q154.1 | length 1577.1
  Top Layer w10: Q133.2 4449.21,3589.21 4449.21,3310.79 Q134.2 4450,3076.85 Q139.3 ; Q133.2@4450,3591.57 4450,3669.14 4455.86,3675 4922.57,3675 4928.43,3669.14 Q154.1 4928.43,3320 Q153.1
  Bottom Layer w10: Q133.2 Q133.2@4450,3591.57
NetQ133_3: Q133.3 Q134.3 Q139.1 | length 611.3
  Top Layer w10: Q139.1 4351.57,2981.57 Q134.3 4350.79,3310.79 4350.79,3589.21 Q133.3
NetQ143_1: Q143.1 Q170.1 Q170.2 Q171.2 | length 752.6
  Top Layer w10: Q170.1 Q170.2 1725,1275 1895.72,1275 1901.57,1280.86 Q143.1
  Bottom Layer w10: Q170.2 Q171.2
NetQ146_1: Q146.1 Q162.2 Q171.1 | length 888.9
  Top Layer w10: Q171.1 1551.57,1845.72 1557.43,1851.57 1901.57,1851.57 ; Q146.1 1901.57,1851.57 ; Q162.2 1901.57,1851.57
NetQ147_3: Q147.3 Q155.3 Q156.3 Q157.3 Q164.1 R3.2 R4.2 | length 1683.3
  Top Layer w10: Q156.3 4045,5371.57 Q164.1 4061.57,5365 Q147.3 ; R3.2 4300,5015 Q155.3
  Bottom Layer w10: Q157.3 Q156.3 ; R4.2 4300,5415 Q147.3 Q155.3
NetQ148_2: Q148.2 Q149.2 Q165.3 Q166.3 Q176.2 Q177.2 | length 1290.4
  Top Layer w10: Q177.2 Q176.2 ; Q165.3 4825,6973.43 Q149.2 Q148.2
  Bottom Layer w10: Q176.2 4548.43,6698.43 Q166.3 4676.57,6825 Q165.3
NetQ148_3: Q148.3 Q149.3 Q165.1 | length 500
  Top Layer w10: Q165.1 Q149.3 Q148.3
NetQ151_1: Q151.1 Q152.1 Q180.2 Q182.2 Q217.3 | length 1354.6
  Top Layer w10: Q151.1 Q152.1 Q217.3 4775,2348.43 4775,2305.86 4780.86,2300 5069.14,2300 5075,2305.86 Q182.2
  Bottom Layer w10: Q180.2 4675,2448.43 Q217.3
NetQ153_2: Q153.2 Q154.2 Q161.3 Q172.3 Q183.2 Q186.2 | length 1634.2
  Top Layer w10: Q153.2 4825,3315 4825,3585 Q154.2 ; Q172.3 Q161.3
  Bottom Layer w10: Q183.2 Q186.2 4600,3700 4720,3700 Q154.2 ; Q153.2 4820,3078.43 Q172.3
NetQ153_3: Q153.3 Q154.3 Q161.1 | length 747.7
  Top Layer w10: Q154.3 4726.57,3585 4726.57,3315 Q153.3 4854.72,3176.85 Q161.1
NetQ156_2: Q156.2 Q157.2 Q164.3 Q179.3 Q189.3 Q190.2 Q190.3 Q192.2 Q192.3 R5.1 R6.1 | length 3083.3
  Top Layer w10: Q156.2 3946.57,5470 Q164.3 ; Q192.2 Q192.3 R5.1 4300,4466.57 Q189.3
  Bottom Layer w10: Q157.2 Q156.2 ; Q192.2 4175,4800 4175,5567.57 4169.14,5573.43 Q164.3 Q190.2 Q190.3 4153.43,5845 Q179.3@4346.57,5845 ; R6.1 4275,5916.57 Q179.3@4346.57,5845 ; Q179.3 Q179.3@4346.57,5845
NetQ158_1: Q158.1 Q159.1 Q193.2 Q194.2 Q213.3 | length 1173.6
  Top Layer w10: Q193.2 Q194.2 2900,2215 Q213.3 2900,2023.43 Q159.1 Q158.1
NetQ160_3: Q160.3 R15.1 R18.2 | length 6013.6
  Top Layer w10: R15.1 950,3675 975,3650 975,1175 1000,1150 3844.14,1150 3850,1155.86 R18.2 3798.43,1326.57 Q160.3
NetQ166_1: Q166.1 Q176.3 Q177.3 | length 510
  Top Layer w10: Q177.3 Q176.3
  Bottom Layer w10: Q176.3 Q166.1
NetQ169_1: Q169.1 Q246.2 Q246.3 Q247.3 Q248.3 | length 966.2
  Top Layer w10: Q246.2 Q246.3
  Bottom Layer w10: Q169.1 3950,6826.57 Q246.2 ; Q247.3 Q248.3 4149.21,6450.79 4149.21,6724.21 Q246.3
NetQ170_3: Q170.3 Q199.1 Q199.2 Q200.2 | length 1506.1
  Top Layer w10: Q200.2 1301.57,1419.14 1307.43,1425 1744.14,1425 1750,1419.14 1750,1351.57 Q170.3 ; Q199.1 Q199.2
  Bottom Layer w10: Q199.2 1650,1850 1700,1800 1819.14,1800 1825,1794.14 1825,1355.86 1819.14,1350 Q170.3
NetQ171_3: Q171.3 Q200.1 | length 1026.6
  Bottom Layer w10: Q200.1 1203.15,1478.15 1225,1500 1469.14,1500 1475,1505.86 1475,1744.14 1480.86,1750 1744.14,1750 1750,1744.14 1750,1651.57 Q171.3 Q171.3@1750,1648.43
NetQ172_1: Q172.1 Q183.3 Q186.3 | length 1331.6
  Bottom Layer w10: Q183.3 Q186.3 4468.78,3732.79 4517.21,3732.79 4625.79,3624.21 4625.79,3075.79 Q172.1
NetQ179_1: Q179.1 Q224.2 R8.2 | length 676.4
  Top Layer w10: Q179.1 4550,5841.57 4550,5919.14 4555.86,5925 4819.14,5925 ; Q224.2 4825,5919.14 4819.14,5925 ; R8.2 4875,5925 4819.14,5925
NetQ180_1: Q180.1 Q182.1 Q214.2 Q265.3 | length 1110.3
  Top Layer w10: Q214.2 5173.43,2198.43 Q182.1
  Bottom Layer w10: Q180.1 4823.43,2750 5169.14,2750 5175,2744.14 5175,2651.57 Q265.3 Q182.1
NetQ180_3: Q180.3 Q182.3 Q217.1 | length 867.3
  Top Layer w10: Q217.1 4576.57,2444.14 4582.43,2450 4926.57,2450 Q182.3
  Bottom Layer w10: Q217.1 Q180.3
NetQ189_1: Q189.1 Q231.2 R7.2 | length 766.6
  Top Layer w10: Q189.1@4550,4413.43 4550,4330.86 4555.86,4325 4819.14,4325 4825,4330.86 Q231.2
  Bottom Layer w10: Q189.1 Q189.1@4550,4413.43 ; Q231.2 5017.44,4607.44 5017.44,4642.44 R7.2
NetQ190_1: Q190.1 Q192.1 Q233.2 Q233.3 Q234.2 Q234.3 | length 1928.1
  Bottom Layer w10: Q233.3 Q233.2 Q234.2 Q234.3 Q190.1@3943.15,5841.57 ; Q192.1 3904.02,4672.56 3904.02,5235.06 3901.57,5237.5 3901.57,5800 Q190.1@3943.15,5841.57 ; Q190.1 Q190.1@3943.15,5841.57
NetQ193_1: Q193.1 Q194.1 Q215.2 Q264.3 | length 1303.3
  Top Layer w10: Q194.1 Q193.1 2903.15,2596.57 Q264.3
  Bottom Layer w10: Q194.1 2901.57,2273.43 2975,2200 3319.14,2200 3325,2205.86 3325,2348.43 Q215.2
NetQ193_3: Q193.3 Q194.3 Q213.1 | length 495.7
  Top Layer w10: Q213.1 3098.43,2101.57 Q194.3 Q193.3
NetQ195_1: Q195.1 Q197.1 Q219.2 Q220.2 Q261.3 | length 2236.2
  Top Layer w10: Q261.3 3375,1650 3375,1850 3500,1975 3744.14,1975 3750,1980.86 3750,2098.43 Q197.1 3746.85,2101.57 Q195.1 3750,2378.15 3750,2469.14 3755.86,2475 4344.14,2475 4350,2469.14 Q219.2 4349.21,2374.21 4349.21,2100.79 Q220.2
NetQ199_3: Q199.3 Q251.3 | length 850.5
  Bottom Layer w10: Q251.3 1398.43,1798.43 1475,1875 1475,2069.14 1480.86,2075 1744.14,2075 1750,2069.14 1750,1951.57 Q199.3
NetQ200_3: Q200.3 R10.2 | length 2685.4
  Top Layer w10: Q200.3 1400,1280.86 1394.14,1275 1155.86,1275 1150,1280.86 1150,2169.14 1155.86,2175 2450,2175 2500,2225 R10.2
NetQ212_1: Q212.1 Q238.2 Q238.3 Q240.3 Q245.3 | length 4858.1
  Bottom Layer w10: Q212.1 3951.57,7423.29 4053.28,7525 5350,7525 5450,7425 5450,5100 5450,5098.43 5450,5048.43 Q238.3 ; Q245.3 Q240.3 5452.36,4775.79 5452.36,5049.21 Q238.3 ; Q238.2 Q238.3
NetQ214_3: Q214.3 Q265.1 | length 613.4
  Bottom Layer w10: Q214.3 4900,2176.57 4900,2573.43 Q265.1
NetQ215_3: Q215.3 Q264.1 | length 759.6
  Bottom Layer w10: Q264.1 3100,2675 Q215.3
NetQ219_1: Q219.1 Q220.1 Q242.2 Q262.3 | length 1401.2
  Top Layer w10: Q242.2 4100,1464.37 4123.43,1487.79 Q262.3 ; Q220.1 4448.43,2101.57 Q219.1
  Bottom Layer w10: Q262.3 4175,1551.57 4175,1969.14 4180.86,1975 4444.14,1975 4450,1980.86 4450,2096.85 Q220.1
NetQ219_3: Q219.3 Q220.3 Q221.3 Q223.3 Q261.1 | length 2768.8
  Top Layer w10: Q261.1 3494.41,1572.56 3494.41,1844.14 3500.27,1850 3744.14,1850 3750,1844.14 Q221.3 3750,1605.86 3755.86,1600 4444.14,1600 4450,1605.86 4450,1773.43 Q223.3 ; Q220.3 4250.79,2100.79 4250.79,2374.21 Q219.3
  Bottom Layer w10: Q220.3 4250,2194.14 4255.86,2200 4494.14,2200 4500,2194.14 4500,1780.86 4494.14,1775 Q223.3
NetQ221_1: Q221.1 Q223.1 Q243.2 | length 1000.5
  Top Layer w10: Q243.2 4000,1705.86 4005.86,1700 4176.57,1700 Q223.1
  Bottom Layer w10: Q221.1 3553.15,1872.29 3559.01,1878.15 3994.14,1878.15 4000,1872.29 Q243.2
NetQ224_1: Q224.1 Q231.1 Q247.2 | length 3347.4
  Bottom Layer w10: Q247.2 4050,6130.86 4055.86,6125 4919.14,6125 4925,6119.14 4925,5836.57 Q224.1 4763.43,5675 4655.86,5675 4650,5669.14 4650,4255.86 4655.86,4250 4825,4250 4923.43,4348.43 Q231.1
NetQ224_3: Q224.3 R8.1 R13.1 R17.2 | length 2655.5
  Top Layer w10: Q224.3 4836.57,5725 5125,5725 ; R13.1 5185.19,4025 5210.19,4050 5294.14,4050 5300,4055.86 5300,5275 5125,5450 5125,5725 ; R17.2 5125,5725
  Bottom Layer w10: R8.1 4700,5868.61 4726.57,5842.04 Q224.3
NetQ225_1: Q225.1 Q226.1 Q240.2 | length 2757.3
  Top Layer w10: Q226.1 4921.85,6450 ; Q225.1 4921.85,6450 ; Q240.2 5700,4923.43 5700,6375 5625,6450 4921.85,6450
  Bottom Layer w10: Q240.2 Q240.2@5551.57,4776.57
NetQ228_1: Q228.1 Q229.1 Q245.2 | length 1001.4
  Top Layer w10: Q228.1 Q229.1
  Bottom Layer w10: Q229.1 5280,4130 Q245.2@5541.52,4391.52
NetQ231_3: Q231.3 R7.1 R9.1 R14.1 | length 1052.9
  Bottom Layer w10: Q231.3 4725.79,4415.79 4725.79,4649.21 R7.1 4725,4744.14 4730.86,4750 5150,4750 R14.1 R9.1
NetQ233_1: Q233.1 Q234.1 Q248.2 | length 818.2
  Bottom Layer w10: Q233.1 Q234.1 3708,6108 Q248.2
NetQ242_3: Q242.3 Q243.3 Q262.1 | length 591.4
  Top Layer w10: Q262.1 4001.57,1425 Q242.3
  Bottom Layer w10: Q243.3 3901.57,1525 Q262.1
NetQ252_3: Q252.3 Q254.3 Q255.3 Q257.3 Q258.3 R10.1 | length 1491.8
  Top Layer w10: Q258.3@1224.21,2250.79 Q258.3 Q257.3 1500.79,2250.79 1799.21,2250.79 1800,2250 1800.79,2250.79 2324.21,2250.79 Q254.3 2325.79,2251.57 2599.21,2525 R10.1 R10.1@2599.21,2525.79
NetQ274_2: Q274.2 Q288.1 R11.1 | length 579.7
  Bottom Layer w10: R11.1 3575,3425 ; Q288.1 3575,3348.43 3575,3425 ; Q274.2 3575,3425
NetQ274_3: Q274.3 Q275.2 Q275.3 Q283.1 | length 1215.1
  Top Layer w10: Q274.3 Q275.3 ; Q275.2 3575,3969.14 3580.86,3975 4075,3975 4096.85,3953.15 Q283.1
  Bottom Layer w10: Q275.3 Q275.2
NetQ279_1: Q279.1 Q289.2 Q289.3 Q292.3 | length 1579.6
  Bottom Layer w10: Q279.1 Q289.3 Q289.2 3400,3975 3400,3705.86 3405.86,3700 3750,3700 3900,3550 Q292.3
NetQ283_2: Q283.2 Q288.2 Q292.2 | length 806.3
  Bottom Layer w10: Q288.2 3579.32,3254.32 3617.56,3254.32 3713.24,3350 3898.43,3350 Q292.2 Q283.2
NetR15_2: R15.2 R16.1 | length 542.3
  Top Layer w10: R15.2 800,3971.85 800,4231.3 R16.1
NetR16_2: R16.2 R26.1 | length 504.7
  Top Layer w10: R16.2 800,4628.15 800,4850 R26.1
pads on no net: J1.4 J1.5 J1.MH1 J1.MH2 R15.3 R16.3

## Polygon pours and split planes (outlines as drawn)
GND on Top Layer "GND_L01_P007" (solid, pour order 7): 530,930 530,5490 810,5490 810,5570 1010,5770 3130,5770 3130,7000 4150,8020 6270,8020 6270,930
GND on Bottom Layer "GND_L02_P008" (solid, pour order 8): 530,930 530,5490 810,5490 810,5570 1010,5770 3130,5770 3130,7000 4150,8020 6270,8020 6270,930

## Silkscreen, mask and mechanical layers (free items; w line width, h text height)
Mechanical 1:
  the board outline again, w10